# EAGLE board VC Panning Mixer PANEL (EAGLE 7.7.0)
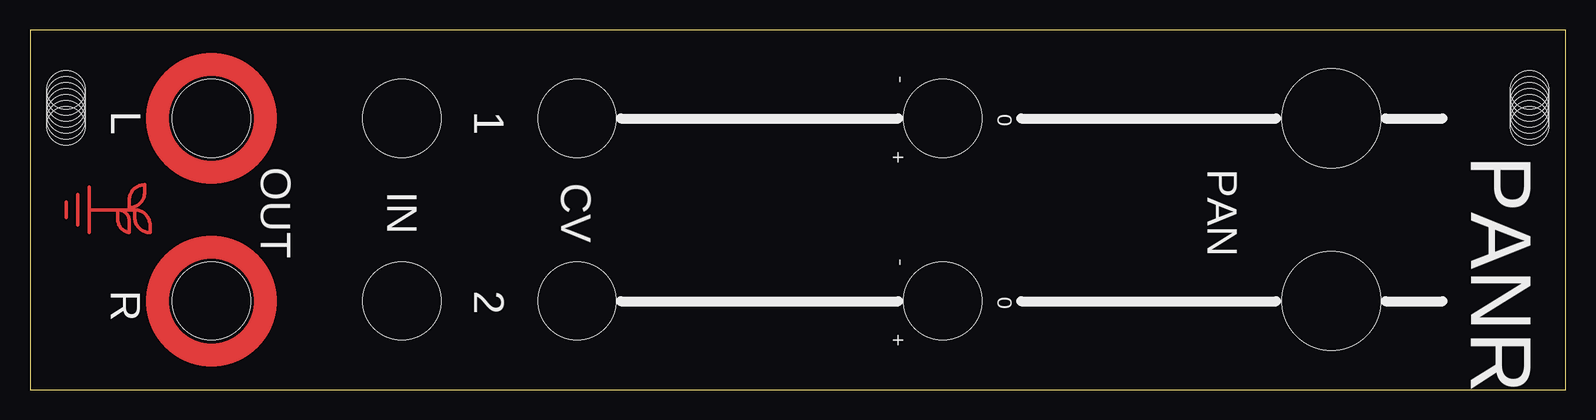
[diagram p0: board, top side]
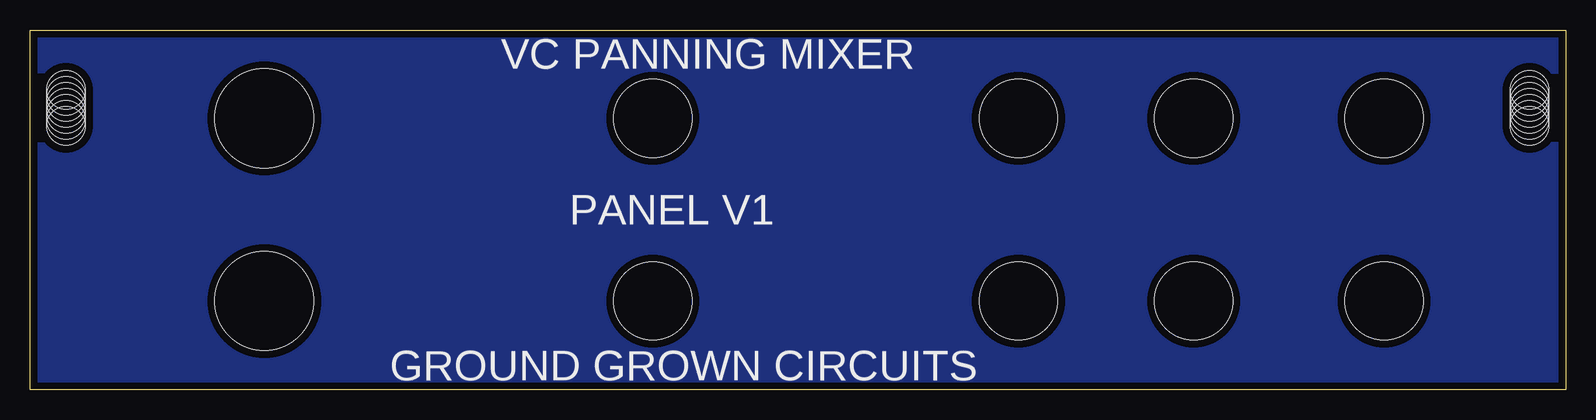
[diagram p1: board, bottom side, seen from below]

Size 128 x 30 mm. Coordinates in mm from the lower left corner, seen from the top.
Outline: 0,0 128,0 128,30 0,30 0,0
Copper layers (1*16): Top 0.035mm / dielectric 1.5mm / Bottom 0.035mm
Design rules "SparkFun": minimum track width 8mil, minimum drill 20mil, track to track 8mil, track to pad 8mil, pad to pad 8mil, via to via 8mil, smd to smd 8mil, copper to edge 8mil, drill to drill 8mil, minimum pad ring 12mil, minimum via ring 10mil, stop-mask expansion 4mil, vias tented up to drill 20mil, thermal gap 10mil

## Footprints (pad centres in the part's own frame; a part is rotated, then mirrored left to right if it is on the bottom)
JACK_DRILL = hole 6.5: 0,0
MOUNT_DRILL = hole 3.2: 3,8; 3,7.5; 3,7; 3,6.5; 3,6; 3,5.5; 3,5
JACK_DRILL_COPPER = hole 6.5: 0,0
POT_DRILL = hole 8.25: 0,0

## Placement (x,y rotation side)
CV1  [JACK_DRILL]  45.6,22.63 90 top
CV2  [JACK_DRILL]  45.6,7.39 90 top
CVA1  B100K  [JACK_DRILL]  76.08,22.63 180 top
CVA2  B100K  [JACK_DRILL]  76.08,7.39 180 top
E$1  [MOUNT_DRILL]  128,30 180 top
E$2  [MOUNT_DRILL]  0,30 180 bottom
E$3  [LOGO_SMALL_COPPER]  5,15 270 top
IN1  [JACK_DRILL]  31,22.63 90 top
IN2  [JACK_DRILL]  31,7.39 90 top
OUTL  [JACK_DRILL_COPPER]  15.12,22.63 0 top
OUTR  [JACK_DRILL_COPPER]  15.12,7.39 180 top
PAN1  B100K  [POT_DRILL]  108.47,22.63 180 top
PAN2  B100K  [POT_DRILL]  108.47,7.39 180 top

## Library data of the parts
CV1 CV2 E$1-E$3 IN1 IN2 OUTL OUTR = GroundGrownCircuits
CVA1 CVA2 PAN1 PAN2 = GroundGrownCircuits; PROD_ID: RES-09177

## Tracks (layer width: path | path; a pad name or v marks a point on that pad's centre or on a via)
S$1
  pour Bottom (isolate 0.61): 0,0 128,0 128,30 0,30

## Text on the board
tPlace: - | L | 1 | 0 | + | OUT | IN | CV | PAN | - | PANR | R | 2 | 0 | +
bPlace: VC PANNING MIXER | PANEL V1 | GROUND GROWN CIRCUITS